# Altium PCB ST-LINK_V2-1.PcbDoc
Units mil, origin at the board's own origin, x right, y up, seen from the top; angles counter-clockwise.
Board outline 1325 x 630 mil, 2 copper layers (Top Layer, Bottom Layer); 41 components, 35 nets, 163 pads, 29 vias.
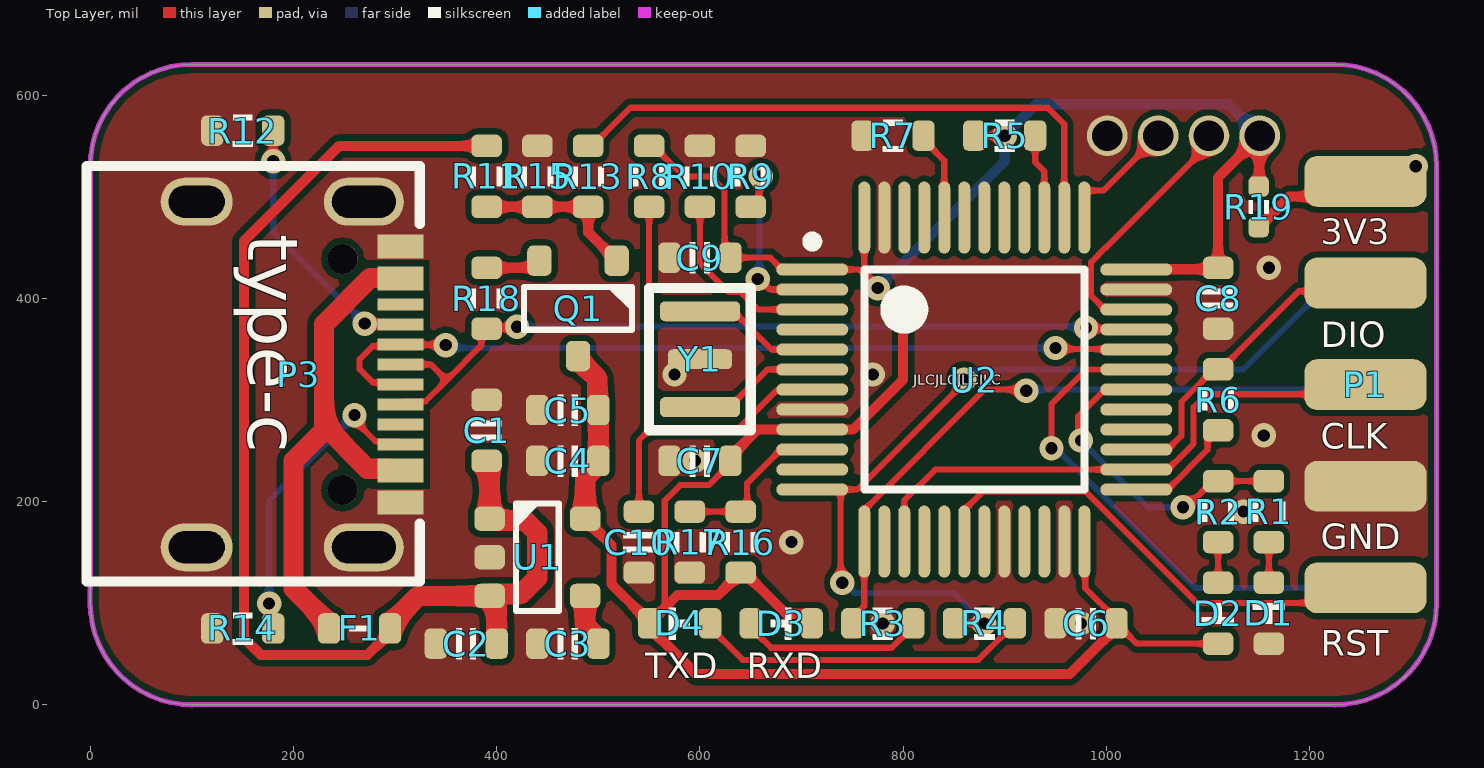
[diagram p0: Top Layer view]
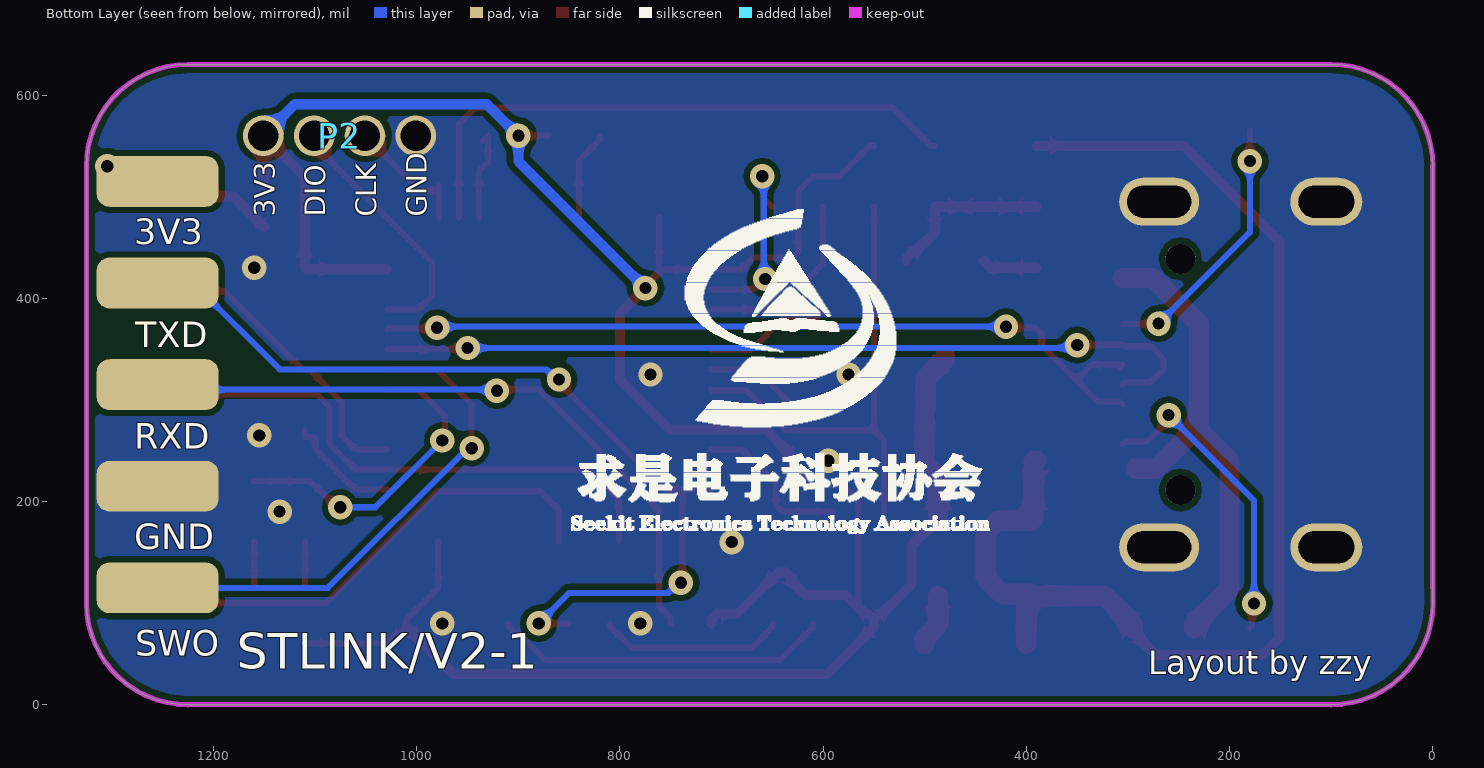
[diagram p1: Bottom Layer view, seen from below]
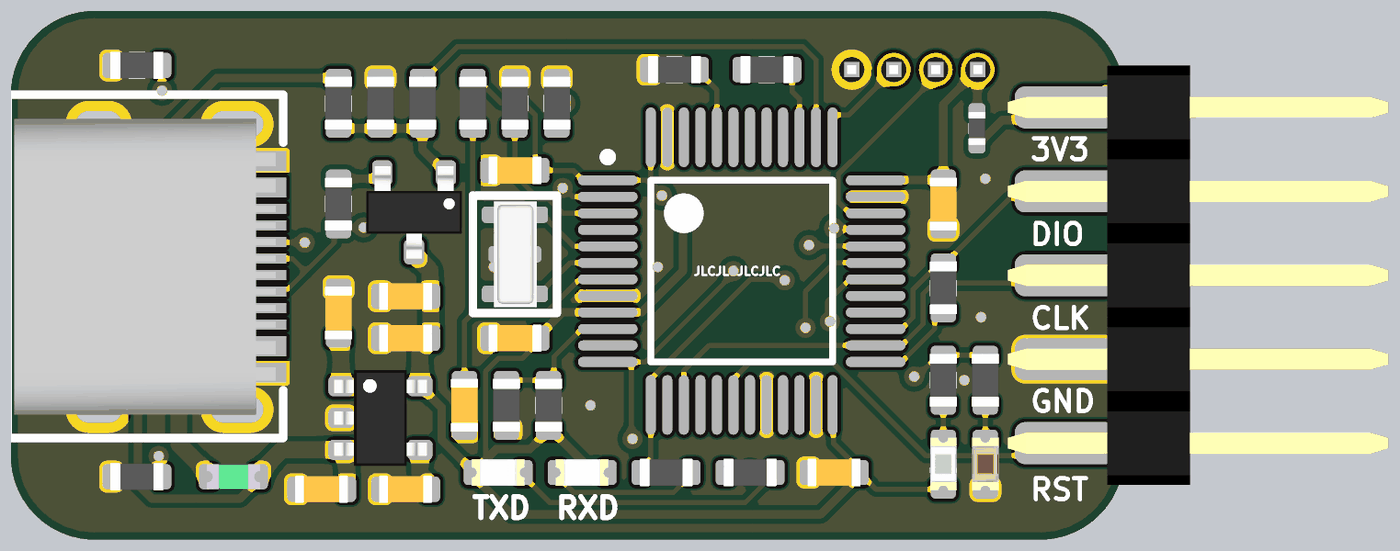
[diagram p2: 3D render of the assembled board from above, using the file's embedded part models]

## Layer stack, top to bottom
Top Solder: solder mask 0.4, Solder Resist, Dk 3.5
Top Layer: signal copper 1.4
Dielectric 1: dielectric 12.6, FR-4, Dk 4.8
Bottom Layer: signal copper 1.4
Bottom Solder: solder mask 0.4, Solder Resist, Dk 3.5

## Board outline
100,0 cw(c100,100) 0,100 0,530 cw(c100,530) 100,630 1225,630 cw(c1225,530) 1325,530 1325,100 cw(c1225,100) 1225,0

## Design rules (kind name [scope] priority, off if disabled: settings)
Clearance keepoutlayer [(InLayerClass('Signal Layers')) vs (OnLayer('Keep-Out Layer'))] p1: gap=6 ignorepadtopadclearanceinfootprint=TRUE
Clearance [All] p2: gap=6 ignorepadtopadclearanceinfootprint=FALSE
ComponentClearance [All] p1: gap=10 collisioncheckmode=3 verticalgap=10 showdistances=TRUE
DiffPairsRouting [All] p1: maxlimit=10 minlimit=6 mostfreqgap=6 toplayer_minwidth=5 toplayer_maxwidth=15 toplayer_prefwidth=6 bottomlayer_minwidth=5 bottomlayer_maxwidth=15 bottomlayer_prefwidth=6 maxuncoupledlength=500
HoleSize [All] p1: absolutevalues=TRUE maxlimit=248 minlimit=8 maxpercent=80.000 minpercent=20.000
HoleToHoleClearance [All] p1: gap=6 allowstackedmicrovias=TRUE
MinimumSolderMaskSliver [All] p1: minsoldermaskwidth=5
PolygonConnect [All] p1: connectstyle=Direct reliefconductorwidth=10 reliefentries=4 polygonreliefangle="90 Angle" airgapwidth=10
RoutingVias [All] p1: holewidth=12 width=24 viastyle="Through Hole" minholewidth=12 minwidth=24 maxholewidth=24 maxwidth=32
SilkToSilkClearance [All] p1: silktosilkclearance=1
SilkToSolderMaskClearance [IsPad] p1: minsilkscreentomaskgap=1 clearancetoexposedcopper=TRUE
SolderMaskExpansion [All] p1: expansion=4 istentingtop=TRUE
Width Width_Power [InNet('3V3') And InNet('VCC')  And InNet('VBUS')] p1: maxlimit=100 minlimit=10 preferedwidth=15
Width [All] p2: maxlimit=50 minlimit=6 preferedwidth=10
23 further rules are at their usual default settings.

## Classes and differential pairs
differential pair USB_D: +USB_D_P -USB_D_N

## Components (designator, comment, footprint, x,y, rotation, side; value= is the part's Value field where it differs from the comment)
C1 "C0603" CAP_0603 390,270 r270 top value=104
C2 "C0603" CAP_0603 370,60 r0 top value=105
C3 "C0603" CAP_0603 470,60 r0 top value=223
C4 "C0603" CAP_0603 470,240 r0 top value=105
C5 "C0603" CAP_0603 470,290 r0 top value=104
C6 "C0603" CAP_0603 980,80 r0 top value=104
C7 "C0603" CAP_0603 600,240 r0 top value=104
C8 "C0603" CAP_0603 1110,400 r90 top value=104
C9 "C0603" CAP_0603 600,440 r0 top value=104
C10 "C0603" CAP_0603 540,160 r90 top value=104
D1 "RED" LED_0603_RED 1160,90 r270 top
D2 "GREEN" LED_0603_GREEN 1110,90 r90 top
D3 "color?" LED_0603 680,80 r180 top
D4 "color?" LED_0603 580,80 r0 top
F1 "500mA" PPTC_0603 265,75 r0 top
P1 "HDR2x5_2.54" HDR2X5_2.54_180H 1255,515 r0 top
P2 "HDR1x4_1.27" HDR1X4_1.27_180 1151,560 r90 bottom
P3 "TypeC" USB_TypeC 205,325 r270 top
Q1 "9013" _SOT23-3 480,390 r270 top
R1 "R0603" RES_0603#1 1160,190 r270 top value=100R
R2 "R0603" RES_0603#1 1110,190 r270 top value=100R
R3 "R0603" RES_0603#1 780,80 r0 top value=100R
R4 "R0603" RES_0603#1 880,80 r0 top value=100R
R5 "R0603" RES_0603#1 900,560 r180 top value=4K7
R6 "R0603" RES_0603#1 1110,300 r90 top value=100R
R7 "R0603" RES_0603#1 790,560 r180 top value=10K
R8 "R0603" RES_0603#1 550,520 r90 top value=100K
R9 "R0603" RES_0603#1 650,520 r270 top value=10K
R10 "R0603" RES_0603#1 600,520 r270 top value=10K
R11 "R0603" RES_0603#1 390,520 r90 top value=10K
R12 "R0603" RES_0603#1 150,565 r180 top value=5K1
R13 "R0603" RES_0603#1 490,520 r90 top value=100R
R14 "R0603" RES_0603#1 150,75 r180 top value=5K1
R15 "R0603" RES_0603#1 440,520 r270 top value=36K
R16 "R0603" RES_0603#1 640,160 r270 top value=4K7
R17 "R0603" RES_0603#1 590,160 r90 top value=4K7
R18 "R0603" RES_0603#2 390,400 r90 top value=1K5
R19 "R0402" RES_0402 1150,490 r270 top value=0R
U1 "RT9193" _SOT23-5 440,145 r0 top value=3V3
U2 "STM32F103CBT6" STM-LQFP48_N 870,320 r0 top
Y1 "8MHz" "MURATA CSTCE" 600,340 r270 top

## Footprints (in the part's own frame and the unit in brackets; to place one, negate y for a bottom-side part, rotate by r counter-clockwise, add the part's x,y. Pads: shape width x height; smd on the part's side, far side on the other; paste and mask are expansions set on the pad)
_SOT23-3 [mil]
  rrect50% 30x24 smd mask+4: 1(-47,38) 2(-47,-38) 3(47,0)
  silkscreen extent -21,-53 21,53, body extent -55,-57 55,57, height 51
_SOT23-5 [mil]
  rrect50% 30x24 smd mask+4: 1(-47,38) 2(-47,0) 3(-47,-38) 4(47,-38) 5(47,38)
  silkscreen extent -21,-53 21,53, body extent -55,-57 55,57, height 57
CAP_0603 [mil]
  rrect50% 22x30 smd mask+4: 1(-30,0) 2(30,0)
  silkscreen extent -10,-15 10,15, body extent -37,-16 37,16, height 34
HDR1X4_1.27_180 [mil]
  round 40 hole 30 mask+4: 1(0,0) 2(0,-50) 3(0,-100) 4(0,-150)
  body extent -49,-175 49,25, height 210
HDR2X5_2.54_180H [mil]
  rrect50% 120x50 smd mask+4: 1(0,0) 3(0,-100) 5(0,-200) 7(0,-300) 9(0,-400)
  rrect50% 120x50 smd far side mask+4: 2(0,0) 4(0,-100) 6(0,-200) 8(0,-300) 10(0,-400)
  body extent -68,-450 385,50, height 100
LED_0603 [mil]
  rrect50% 22x30 smd mask+4: 1(-30,0) 2(30,0)
  silkscreen extent -10,-16 10,16, body extent -31,-16 32,16, height 21
LED_0603_GREEN [mil]
  rrect50% 22x30 smd mask+4: 1(-30,0) 2(30,0)
  silkscreen extent -10,-16 10,16, body extent -31,-16 32,16, height 21
LED_0603_RED [mil]
  rrect50% 22x30 smd mask+4: 1(-30,0) 2(30,0)
  silkscreen extent -10,-16 10,16, body extent -31,-16 32,16, height 21
"MURATA CSTCE" [mm] "murata CSTCE serials crystal"
  rrect50% 0.5x2 smd: 1(-1.199,0) 3(1.199,0)
  rrect50% 0.5x1.6 smd: 2(0,0)
  silkscreen extent -1.78,-1.27 1.78,1.27, body extent -1.6,-0.64 1.6,0.66, height 1.02
PPTC_0603 [mil]
  rrect50% 22x30 smd mask+4: 1(-30,0) 2(30,0)
  silkscreen extent -10,-2 10,2, body extent -31,-15 32,15, height 30
RES_0402 [mil]
  rrect50% 20x20 smd: 1(-20,0) 2(20,0)
  silkscreen extent -7,-10 6,10, body extent -20,-10 20,10, height 16
RES_0603#1 [mil]
  rrect50% 22x30 smd mask+4: 1(-30,0) 2(30,0)
  silkscreen extent -10,-16 10,16, body extent -32,-16 32,16, height 20
RES_0603#2 [mil]
  rrect50% 22x30 smd: 1(-30,0) 2(30,0)
  silkscreen extent -10,-16 10,16, body extent -32,-16 32,16, height 20
STM-LQFP48_N [mm] "QFP, 48-Leads, Body 7x7mm, Pitch 0.5mm, IPC Medium Density"
  oval 1.8x0.3 smd mask+0.102: 1(-4.05,2.75) 2(-4.05,2.25) 3(-4.05,1.75) 4(-4.05,1.25) 5(-4.05,0.75) 6(-4.05,0.25) 7(-4.05,-0.25) 8(-4.05,-0.75) 9(-4.05,-1.25) 10(-4.05,-1.75) 11(-4.05,-2.25) 12(-4.05,-2.75) 25(4.05,-2.75) 26(4.05,-2.25) 27(4.05,-1.75) 28(4.05,-1.25) 29(4.05,-0.75) 30(4.05,-0.25) 31(4.05,0.25) 32(4.05,0.75) 33(4.05,1.25) 34(4.05,1.75) 35(4.05,2.25) 36(4.05,2.75)
  oval 0.3x1.8 smd mask+0.102: 13(-2.75,-4.05) 14(-2.25,-4.05) 15(-1.75,-4.05) 16(-1.25,-4.05) 17(-0.75,-4.05) 18(-0.25,-4.05) 19(0.25,-4.05) 20(0.75,-4.05) 21(1.25,-4.05) 22(1.75,-4.05) 23(2.25,-4.05) 24(2.75,-4.05) 37(2.75,4.05) 38(2.25,4.05) 39(1.75,4.05) 40(1.25,4.05) 41(0.75,4.05) 42(0.25,4.05) 43(-0.25,4.05) 44(-0.75,4.05) 45(-1.25,4.05) 46(-1.75,4.05) 47(-2.25,4.05) 48(-2.75,4.05)
  silkscreen extent -4.17,-2.75 2.75,3.57, body extent -3.5,-3.5 3.5,3.5, height 1.6
USB_TypeC [mm]
  oval 1.2x2 hole 0.8 slot 1.6 at 90 deg mask+0.102: 0(-4.32,1.633) 0(4.32,1.633)
  oval 1.2x1.8 hole 0.8 slot 1.4 at 90 deg mask+0.102: 0(-4.32,-2.547) 0(4.32,-2.547)
  rect 0.3x1.15 smd mask+0.102: A1(-3.35,2.546) A4(-2.55,2.543) A5(-1.25,2.547) A6(-0.25,2.547) A7(0.25,2.546) A8(-1.75,2.547) A9(2.55,2.547) A12(3.35,2.547) B1(3.05,2.547) B4(2.25,2.547) B5(1.75,2.547) B6(0.75,2.547) B7(-0.75,2.546) B8(1.25,2.547) B9(-2.25,2.543) B12(-3.05,2.546)
  round 0.75 hole 0.75 unplated mask+0.102: ""(-2.89,1.102) ""(2.89,1.102)
  silkscreen extent -5.21,-5.3 5.18,3.03, body extent -4.47,-5.1 4.47,2.8, height 3.21

## Part data
C1 C2 C3 C4 C5 C6 C7 C8 C9 C10: library part Cap_0603, "Capacitor", Specification="X7R 50V", Type=0603
D1 D2 D3 D4: library part LED_0603, "LED", Type=0603
F1: library part Fuse, "resettable fuse"
P1 P2: "Header"
P3: library part USB_TypeC, "USB type-c cable"
Q1: library part BJT_NPN, "Transistor", Type=NPN
R1 R2 R3 R4 R5 R6 R7 R8 R9 R10 R11 R12 R13 R14 R15 R16 R17 R18: library part Res_0603, "SMT Resistor", Specification=±5%, Type=0603
R19: library part Res_0402, "SMT Resistor", Specification=±5%, Type=0402
U1: "Power", Type=SOT23-5
U2: "ARM Cortex-M3 32-bit MCU, 128 KB Flash, 20 KB Internal RAM, 37 I/Os, 48-pin LQFP, -40 to 85 degC, Tray", I/Os (High Current)=37, Operating Frequency(F) (Processor speed) (MHz)=72, Supplier Part Number 1=497-6288-ND, Supply Voltage(Vcc) min (V)=2, A/D Converter="2x12-bit (10 Channel)", ComponentLink1Description="Manufacturer URL", ComponentLink1URL=http://www.st.com/web/en/home.html, ComponentLink2Description=Datasheet, ComponentLink2URL=http://www.st.com/st-web-ui/static/active/en/resource/technical/document/datasheet/CD00161566.pdf, ComponentLink3Description="Package Specification", ComponentLink3URL=http://www.st.com/st-web-ui/static/active/en/resource/technical/document/datasheet/DM00058181.pdf, Core="ARM Cortex-M3", DatasheetVersion="Rev. 16", FLASH Size (Prog) (kB)=128, Internal RAM Size (kB)=20, Mounting Technology="Surface Mount", PackageDescription="48-Pin Low Profile Quad Flat Package, 7 x 7 mm Body, 0.5 mm Pitch", PackageReference=LQFP48, PackageVersion="Rev. 6, 06/2013", Packing=Tray, PartNumber=STM32F103CBT6, Supplier 1=Digi-Key, Supplier 2=Farnell, Supplier 3=Newark, Supplier 4=Newark, Supplier 5=Mouser, Supplier Part Number 2=1606327, Supplier Part Number 3=11N8296, Supplier Part Number 4=57P1214, Supplier Part Number 5=511-STM32F103CBT6
Y1: library part XTAL_MURATA_3P, "Crystal Oscillator With Caps Inside"

## Via types
v1: diameter 24, hole 12, Top Layer to Bottom Layer, tented both sides, 29 vias

## Nets (pads, with @x,y where several pads share a name; then routed paths per layer and width w, separated by ;. In a path a pad name is that pad's centre, name@x,y a point inside that pad or via, vN(x,y) a via of type N, cw(c..) or ccw(c..) an arc to the next point about the centre after c; other vN are vias at no path point)
3V3: C4.2 C5.2 C6.2 C7.2 C8.2 C9.2 D2.1 D3.1 D4.1 P2.1 Q1.3 R5.2 R8.2 R16.2 R19.1 U1.5 U2.1 U2.9 U2.24 U2.36 U2.48 | length 2890.1
  Top Layer w6: R8.2 554,550 584,520 610,520 624.24,505.76 624.24,445.76 C9.2 669.29,440 681.02,428.27 U2.1 756.73,428.27 760.15,424.85 773.42,411.58 v1(775,410) 775,413.16 761.73,426.43 U2.48 ; 565.35,95.35 565.35,200.85 580.49,216 608.65,216 630,237.35 C7.2 ; R5.2 v1(900,560) ; U2.24 979.38,159.44 979.23,159.29 979.23,114.77 1010,84 C6.2 1010,77.35 1017.81,69.54 1020.46,69.54 1030,60 D2.1 ; U2.36 1029.8,428.61 U2.36@1030,428.82
  Top Layer w10: U1.5 489.46,183 496.38,176.08 496.38,173.62 513,157 513,118.67 541.97,89.69 544.04,89.69 D4.1@550,83.73 ; C7.2 630,243.94 656.84,270.79 U2.9 750.79,270.79 800,320 800,385 v1(775,410) ; D3.1 710,83.73 704.04,89.69 684.31,89.69 644,130 636.27,130 630.31,124.04 630.31,120.31 618,108 578,108 565.35,95.35 559.69,89.69 555.96,89.69 D4.1@550,83.73 ; C6.2@1010,77.35 1010,76.27 963.73,30 596.27,30 550,76.27 D4.1@550,83.73 ; U2.36@1029.8,428.61 1108.61,428.61 C8.2 1110,519 P2.1@1150.5,559.5 ; R19.1 1150.5,510.5 P2.1@1150.5,559.5 ; P2.1 P2.1@1150.5,559.5
  Top Layer w20: Q1.3 480,340 499,321 499,291 C5.2 C4.2 500,236 499,235 498.72,235 487,223.28 U1.5
  Bottom Layer w10: v1(775,410) 900,535 v1(900,560) 931,591 1120,591 P2.1
5V: C1.2 C2.2 F1.2 R11.2 U1.1 U1.3 | length 1205.1
  Top Layer w10: F1.2 295,71.27 288.73,65 272.73,49 167.67,49 151.14,65.53 151.14,140.58 151.14,456.14 245,550 R11.2
  Top Layer w20: F1.2 295,79 323,107 U1.3 395,109 400,109 424,109 440,125 440,169.28 428.28,181 395,181 U1.1 393,239 392,240 C1.2 ; U1.3@396,107 398,105 398,102 400,100 C2.2
AIN: R16.1 R17.2 U2.10 | length 158.4
  Top Layer w6: R17.2 R16.1 646.5,196.5 646.5,217.97 679.63,251.1 U2.10
CC1: P3.A5 R12.1 | length 262.9
  Top Layer w6: v1(180,535) R12.1 ; v1(270,375) 270.39,374.61 304.9,374.61 P3.A5
  Bottom Layer w6: v1(180,535) 180,465 v1(270,375)
CC2: P3.B5 R14.1 | length 306.8
  Top Layer w6: v1(175.99,99.59) 178,97.59 178,77 R14.1 ; v1(260,285) 263.44,281.56 263.44,276.38 280.82,259.01 302.39,259.01 P3.B5
  Bottom Layer w6: v1(175.99,99.59) 175.99,200.99 v1(260,285)
GND: C1.1 C2.1 C3.1 C4.1 C5.1 C6.1 C7.1 C8.1 C9.1 C10.1 D1.2 P1.7 P1.8 P2.4 P3.0 P3.A1 P3.A12 P3.B1 P3.B12 R7.2 R9.1 R10.1 R12.2 R14.2 R15.1 R17.1 U1.2 U2.8 U2.20 U2.23 U2.35 U2.47 Y1.2
  other v1: 780,80 975,80 690,160 1135,190 595,240 1155,265 575,325 770,325 1160,430
LED_STLINK: R1.1 R2.1 U2.30 | length 315.9
  Top Layer w6: v1(975,260) 972.37,262.63 972.37,284 998.53,310.16 U2.30 ; v1(1075.35,194.31) 1078.96,194.31 1104.65,220 R2.1 R1.1
  Bottom Layer w6: v1(975,260) 1040.69,194.31 v1(1075.35,194.31)
NetC3_2: C3.2 U1.4 | length 52.4
  Top Layer w20: U1.4 487,78.35 500,65.35 C3.2
NetC10_2: C10.2 R8.1 U2.7 | length 481.3
  Top Layer w6: C10.2 540,260 550,270 ; R8.1 550,270 ; U2.7 709.44,309.05 675.3,309.05 653.17,286.91 636.26,270 550,270
NetD1_1: D1.1 R1.2 | length 40
  Top Layer w6: D1.1 R1.2
NetD2_2: D2.2 R2.2 | length 40
  Top Layer w6: D2.2 R2.2
NetD3_2: D3.2 R3.2 | length 183.8
  Top Layer w6: D3.2 650,76 670,56 788.65,56 800.65,68 810,77.35 R3.2
NetD4_2: D4.2 R4.2 | length 333.7
  Top Layer w6: D4.2 610,76 642,44 874,44 899.54,69.54 902.19,69.54 910,77.35 R4.2
NetQ1_1: Q1.1 R11.1 R13.1 R15.2 | length 166
  Top Layer w10: R11.1 R15.2 R13.1 490,465 508.62,446.38 511.08,446.38 518,439.46 Q1.1
NetQ1_2: Q1.2 R18.2 | length 54.9
  Top Layer w10: R18.2 435.08,430 442,436.92 Q1.2
NetR5_1: R5.1 U2.39 | length 91.3
  Top Layer w6: R5.1@935,555 R5.1 930,533.82 938.9,524.92 U2.39
NetR7_1: R7.1 U2.44 | length 89
  Top Layer w6: R7.1 820,556 840.47,535.53 U2.44
NetR9_2: R9.2 U2.2 | length 194.6
  Top Layer w6: R9.2 650.44,490 658.25,497.81 658.25,518.25 v1(660,520) ; v1(656.96,419) 658.37,419 668.79,408.58 U2.2
  Bottom Layer w6: v1(656.96,419) 658.48,420.52 658.48,518.48 v1(660,520)
NetR10_2: R10.2 U2.3 | length 184.9
  Top Layer w6: R10.2 600,434.49 628.45,406.04 640.22,406.04 657.36,388.9 U2.3
OSC_IN: U2.5 Y1.1 | length 126.2
  Top Layer w6: Y1.1 605.66,381.54 638.46,381.54 670.47,349.53 U2.5
OSC_OUT: U2.6 Y1.3 | length 125.9
  Top Layer w6: Y1.3 629.08,292.8 666.12,329.84 U2.6
ST_SWCLK: P2.3 U2.37 | length 127.3
  Top Layer w6: U2.37 U2.37@978.27,503.29 ; U2.37@978.27,510.55 U2.37@978.27,503.29 ; P2.3 996.98,505.98 980.95,505.98 U2.37@978.27,503.29
ST_SWDIO: P2.2 U2.34 | length 256.8
  Top Layer w6: U2.34 998.53,388.9 985.02,402.41 985.02,435.59 1000,450.57 1000,450 1101,551 P2.2
T_3V3: P1.1 P1.2 R19.2 | length 123.6
  Top Layer w10: R19.2 1180,500 1240,500 P1.1
  other v1: 1304.62,530
T_JTCK_SWCLK: P1.5 U2.15 U2.26 | length 562.7
  Top Layer w6: U2.15 801.1,201.1 831.42,231.42 U2.26 1060.37,231.42 1085.88,256.93 1085.88,292.91 1098.47,305.5 1245.5,305.5 P1.5
T_JTMS_SWDIO: P1.3 R6.2 U2.27 | length 312.9
  Top Layer w6: U2.27 1060.37,251.1 1073.88,264.61 1073.88,297.88 1106,330 R6.2 1112.65,330 1122,339.35 1189.51,406.87 1246.87,406.87 P1.3
T_NRST: P1.9 U2.18 | length 485.2
  Top Layer w6: U2.18 860.16,191.47 878.68,210 979.43,210 1089.43,100 1240,100 P1.9
T_RXD: P1.6 R3.1 U2.13 | length 661.8
  Top Layer w6: R3.1 750,85.35 761.73,97.09 761.73,191.47 880.47,310.21 919.94,310.21 v1(921.15,309)
  Bottom Layer w6: v1(921.15,309) 922.15,310 1250,310 P1.6
T_SWDIO_IN: R6.1 U2.25 | length 115.1
  Top Layer w6: U2.25 1060.37,211.73 1099.54,250.9 1099.54,262.19 1100.87,263.51 1110,263.51 R6.1
T_SWO: P1.10 U2.31 | length 506.9
  Top Layer w6: v1(945.97,252.42) 945.97,295.85 979.97,329.84 U2.31
  Bottom Layer w6: v1(945.97,252.42) 950,252.42 1087.42,115 P1.10
T_TXD: P1.4 R4.1 U2.12 | length 906.8
  Top Layer w6: U2.12 735.86,211.73 754.98,211.73 860,316.75 v1(860,320) ; U2.12@738.54,209.05 738.54,121.46 v1(740,120) ; R4.1 v1(880,80)
  Bottom Layer w6: v1(740,120) 742.51,120 752.51,110 850,110 v1(880,80) ; v1(860,320) 862.51,320 872.51,330 1135,330 1220,415 P1.4
USB_D_N: P3.A7 P3.B7 U2.32 | length 828.9
  Top Layer w6: P3.A7 303.3,317.1 277.9,317.1 265,330 265,340 277.75,352.75 303.45,352.75 P3.B7 305.56,354.2 349.54,354.2 v1(349.87,353.87) ; v1(950,351) 951,350 1028.98,350 U2.32
  Bottom Layer w6: v1(349.87,353.87) 352.75,351 v1(950,351)
USB_D_P: P3.A6 P3.B6 R18.1 U2.33 | length 819.6
  Top Layer w6: P3.B6 308.2,298.38 329.72,298.38 350.67,319.33 ; P3.A6@308.2,331.93 P3.A6 308.2,334.84 335.16,334.84 350.67,319.33 ; v1(420,372) 419,371 391,371 384.86,364.86 384.86,353.51 350.67,319.33 ; v1(980,371) 980.89,370.11 1028.56,370.11 U2.33
  Bottom Layer w6: v1(420,372) 979,372 v1(980,371)
USB_RENUMn: R13.2 U2.38 | length 582.8
  Top Layer w6: R13.2 494,550 520,576 531.51,587.51 942.49,587.51 958.58,571.42 U2.38
VBUS: F1.1 P3.A4 P3.A9 P3.B4 P3.B9 | length 500.8
  Top Layer w20: 230,275 272.67,232.33 P3.B4@292.66,232.33 ; F1.1 235,79 200,114 200,240 230,270 230,374.6 275.4,420 P3.A4@305.13,420
pads on no net: P3. P3.A8 P3.B8 U2.4 U2.11 U2.14 U2.16 U2.17 U2.19 U2.21 U2.22 U2.28 U2.29 U2.40 U2.41 U2.42 U2.43 U2.45 U2.46

## Polygon pours and split planes (outlines as drawn)
GND on Bottom Layer "GND_L02_P001" (solid, remove dead copper, pour order 1): 0,0 0,630 1325,630 1325,0
GND on Top Layer "GND_L01_P000" (solid, remove dead copper, pour order 0): 0,0 0,630 1325,630 1325,0

## Keep-outs
Keep-Out Layer:
  lines w5: -0.12,530 cw(c100,530) 100,630.12 ; 0,530 0,115 -0.12,115.12 -0.12,100 ccw(c100,100) 100,-0.12 ; 100,0 1225,0 ; 100,630 1225,630 ; 1225,-0.12 ccw(c1225,100) 1325.12,100 ; 1225,630.12 cw(c1225,530) 1325.12,530 ; 1325,100 1325,530

## Silkscreen, mask and mechanical layers (free items; w line width, h text height)
Top Overlay:
  text "3V3" at 1211,453 h25
  text "DIO" at 1211,352 h25
  text "JLCJLCJLCJLC" at 810,315 h10
  text "CLK" at 1211,252 h25
  text "GND" at 1211,153 h25
  text "RST" at 1211,48 h25
  text "TXD" at 546,26 h25
  text "RXD" at 646,26 h25
Bottom Overlay:
  drawing of 1747 lines, arcs and shapes, not listed
  text "GND" at 990,480 h20 r270
  text "CLK" at 1040,480 h20 r270
  text "DIO" at 1090,480 h20 r270
  text "3V3" at 1140,480 h20 r270
  text "3V3" at 1278,453 h25
  text "TXD" at 1277,352 h25
  text "RXD" at 1278,252 h25
  text "GND" at 1278,153 h25
  text "SWO" at 1277,48 h25
  text "STLINK/V2-1" at 1176.94,23.39 h60
  text "Layout by zzy" at 279.96,22.03 h40
Mechanical 1:
  the board outline again, w5

## Text inside footprints (layer, text, board x,y; h text height)
P3: Top Overlay "type-c" at 155.3,463.11 h50 r270